# Altium PCB 2019-07-31_20-05-55.PcbDoc
Units mil, origin at the board's own origin, x right, y up, seen from the top; angles counter-clockwise.
Board outline 3200 x 1600 mil, 4 copper layers (Top Layer, MidLayer1, MidLayer2, Bottom Layer); 20 components, 11 nets, 51 pads, 32 vias.
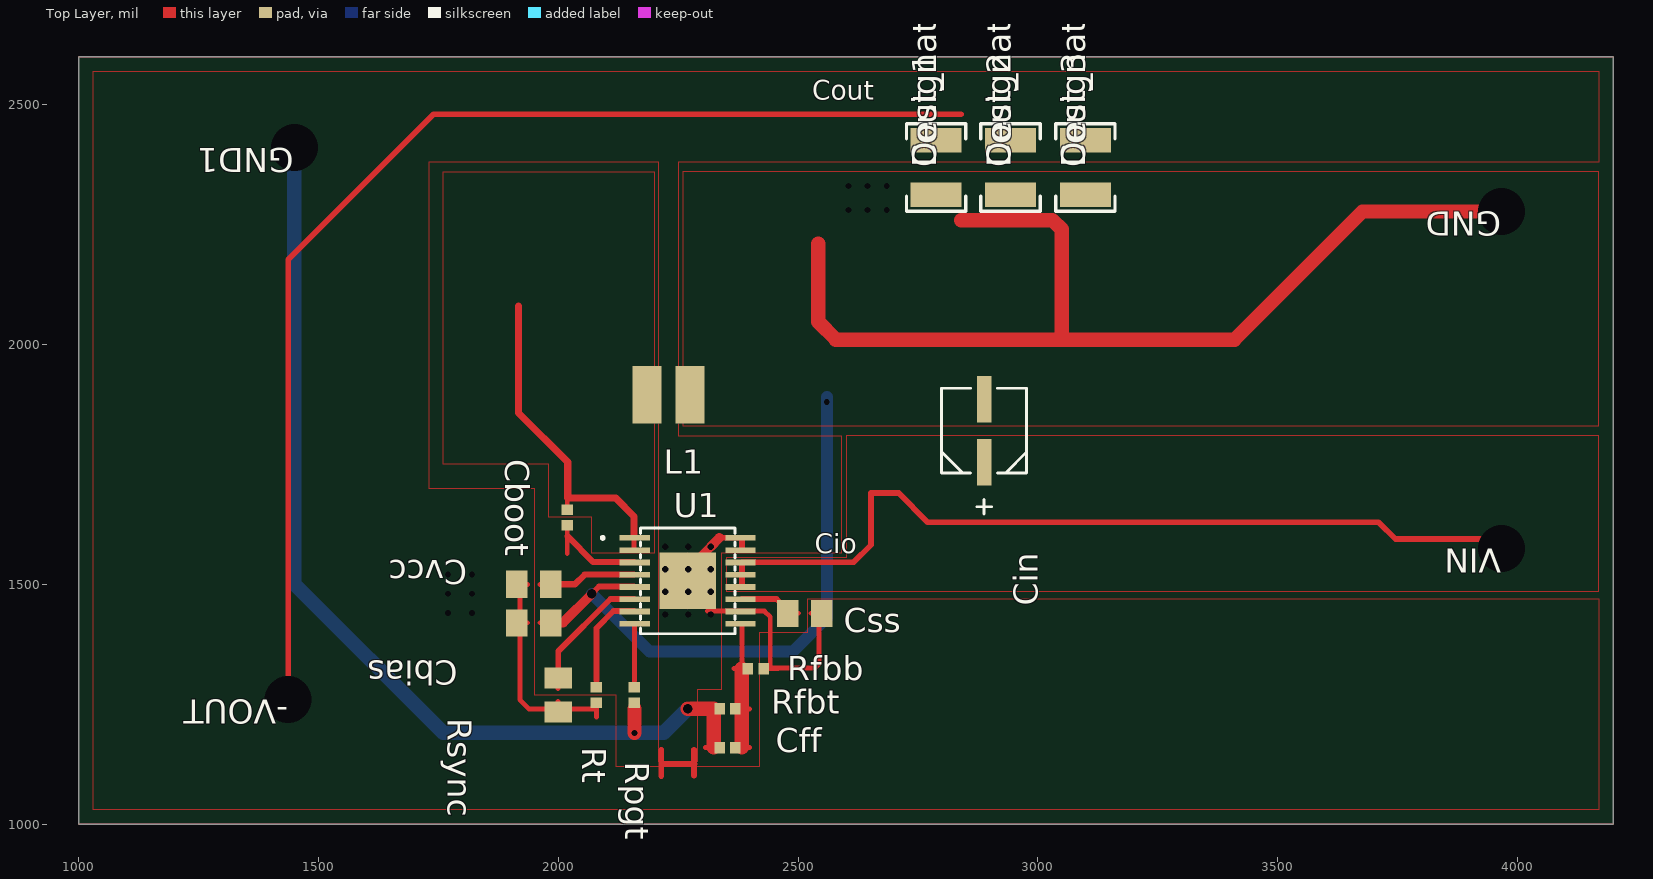
[diagram p0: Top Layer view]
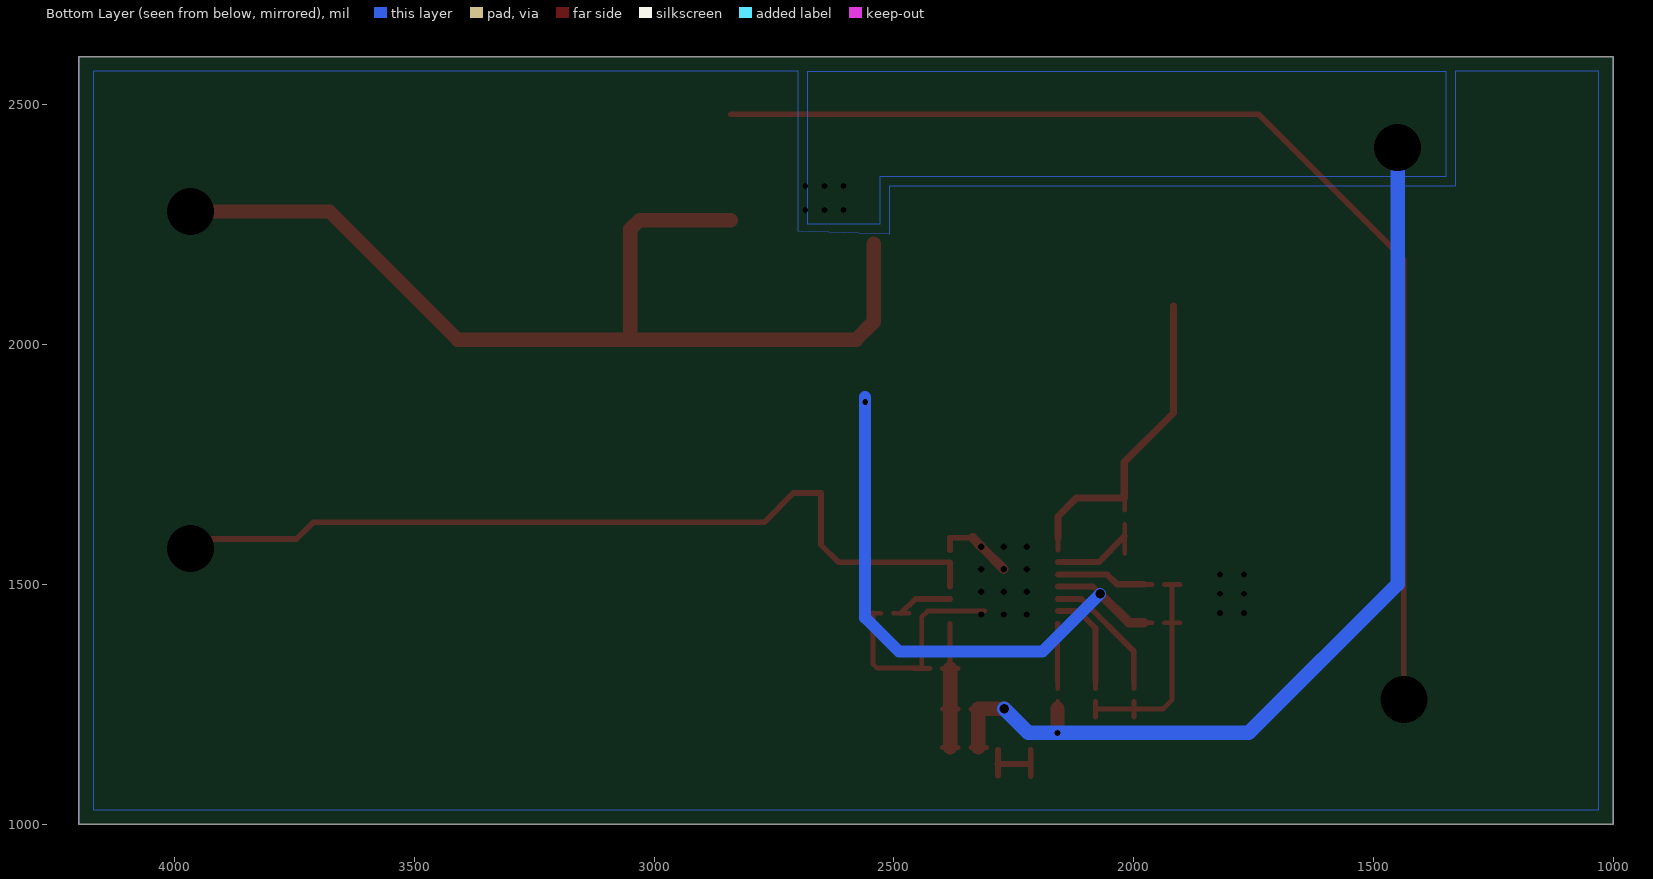
[diagram p1: Bottom Layer view, seen from below]

## Layer stack, top to bottom
Top Layer: signal copper 1.4
Dielectric: core 12.6, FR-4, Dk 4.8
MidLayer1: signal copper 1.4
Dielectric: prepreg 12.6, FR-4, Dk 4.8
MidLayer2: signal copper 1.4
Dielectric: core 12.6, FR-4, Dk 4.8
Bottom Layer: signal copper 1.4

## Board outline
1000,1000 4200,1000 4200,2600 1000,2600

## Design rules (kind name [scope] priority, off if disabled: settings)
PlaneConnect [All] p0: scope1count=1 scope1_0_kind=Board scope1_0_value=Board scope2count=1 scope2_0_kind=Board scope2_0_value=Board commentlength=0 planeconnectstyle=Direct reliefexpansion=20 reliefentries=4 reliefconductorwidth=10 reliefairgap=10
PlaneConnect [All] p1: planeconnectstyle=Direct reliefexpansion=20 reliefentries=4 reliefconductorwidth=10 reliefairgap=10
PolygonConnect [All] p0: scope1count=1 scope1_0_kind=Board scope1_0_value=Board scope2count=1 scope2_0_kind=Board scope2_0_value=Board commentlength=0 connectstyle=Direct reliefconductorwidth=10 reliefentries=4 polygonreliefangle="90 Angle"
PolygonConnect [All] p1: connectstyle=Direct reliefconductorwidth=10 reliefentries=4 polygonreliefangle="90 Angle"

## Components (designator, comment, footprint, x,y, rotation, side; value= is the part's Value field where it differs from the comment)
-VOUT "" TP-1502 1437,1259 r180 top
Cbias "" 0805 1949,1419 r180 top
Cboot "" 0402 2019,1639 r270 top
Cff "" 0402 2353,1159 r0 top
Cin "" SM_RADIAL_B 2888,1820 r90 top
Cout_1 "" 1210_270 2788,2369 r90 top
Cout_2 "" 1210_270 2943,2369 r90 top
Cout_3 "" 1210_270 3099,2369 r90 top
Css "" 0805 2514,1439 r0 top
Cvcc "" 0805 1949,1500 r180 top
GND "" TP-1502 3966,2277 r180 top
GND1 "" TP-1502 1449,2409 r180 top
L1 "" ME3220 2230,1895 r0 top
Rfbb "" 0402 2412,1324 r0 top
Rfbt "" 0402 2353,1240 r0 top
Rpgt "" 0402 2159,1269 r270 top
Rsync "" 0805 2000,1269 r270 top
Rt "" 0402 2079,1269 r270 top
U1 "" PWP0016F 2270,1507 r0 top
VIN "" TP-1502 3966,1574 r180 top

## Footprints (in the part's own frame and the unit in brackets; to place one, negate y for a bottom-side part, rotate by r counter-clockwise, add the part's x,y. Pads: shape width x height; smd on the part's side, far side on the other; paste and mask are expansions set on the pad)
0402 [mil]
  rect 22x24 smd: 1(-16.5,0) 2(16.5,0)
0805 [mil]
  rect 44x57 smd: 1(-35.5,0) 2(35.5,0)
1210_270 [mm]
  rect 1.3x2.7 smd: 1(-1.45,0) 2(1.45,0)
  silkscreen extent -2.32,-1.57 2.32,1.57
ME3220 [mil]
  rect 60x120 smd: 1(-45,0) 2(45,0)
PWP0016F [mm]
  rect 1.6x0.3 smd: 1(-2.8,2.275) 2(-2.8,1.625) 3(-2.8,0.975) 4(-2.8,0.325) 5(-2.8,-0.325) 6(-2.8,-0.975) 7(-2.8,-1.625) 8(-2.8,-2.275) 9(2.8,-2.275) 10(2.8,-1.625) 11(2.8,-0.975) 12(2.8,-0.325) 13(2.8,0.325) 14(2.8,0.975) 15(2.8,1.625) 16(2.8,2.275)
  rect 3x3 smd: 17(0,0)
  silkscreen extent -4.58,-2.8 2.5,2.8
SM_RADIAL_B [mil]
  rect 97x30 smd: 1(-66,0) 2(66,0)
  silkscreen extent -174,-88 88,88
TP-1502 [mil]
  round 65 / inner round 0 / far side round 65 hole 32: 1(0,0)

## Via types
v1: diameter 0, hole 12, Top Layer to Bottom Layer, 14 vias
v2: diameter 0, hole 13, Top Layer to Bottom Layer, 12 vias
v3: diameter 0, hole 98, Top Layer to Bottom Layer, 4 vias
v4: diameter 0, hole 20, Top Layer to Bottom Layer, 2 vias

## Nets (pads, with @x,y where several pads share a name; then routed paths per layer and width w, separated by ;. In a path a pad name is that pad's centre, name@x,y a point inside that pad or via, vN(x,y) a via of type N, cw(c..) or ccw(c..) an arc to the next point about the centre after c; other vN are vias at no path point)
0: -VOUT.1 Cbias.2 Cout_1.2 Cout_2.2 Cout_3.2 Css.2 Cvcc.2 Rfbb.2 Rsync.2 Rt.2 U1.10 U1.15 U1.16 U1.17 | length 3851.7
  Top Layer w10: Cbias.2@1903,1419.5 1936,1419.5 ; Cvcc.2@1903,1499.5 1936,1499.5 ; Cvcc.2@1920,1500 1920,1420 1920,1259 1939,1240 2000,1240 2080,1240 ; Rsync.2@1999.5,1223 1999.5,1256 ; 2079.5,1223 Rt.2@2079.5,1256 ; 2311,1444 2383,1444 2430,1444 2442,1432 2442,1325 2535,1325 2544,1334 Css.2@2544,1440 ; Rfbb.2@2425,1324.5 2458,1324.5 ; 2527,1439.5 Css.2@2560,1439.5
  Top Layer w12: v3(1437,1260) 1437,2177 1740,2480 2840,2480 ; 2215,1100 2215,1125 ; 2215,1155 2215,1125 ; 2283,1101 2283,1125 ; 2283,1155 2283,1125 ; 2336,1597 2383,1597 U1.15@2383,1571 ; 2215,1125 2283,1125 ; 2283,1125 2284,1125 2283,1125
  Top Layer w20: v2(2271,1531) v2(2318,1578) 2336,1597
  other v1: 1770,1440 1820,1440 1770,1480 1820,1480 1770,1520 1820,1520
  other v2: 2223,1437 2271,1437 2318,1437 2223,1484 2271,1484 2318,1484 2223,1531 2318,1531 2223,1578 2271,1578
2: Cin.1 U1.12 U1.13 U1.14 VIN.1 | length 1797.7
  Top Layer w12: U1.12@2383,1495 2383,1520 2383,1546 2616,1546 2652,1582 2652,1690 2710,1690 2770,1629 3010,1629 3710,1629 3746,1594 VIN.1@3967,1594
  other v3: 3967,1574
6: Cff.2 Rfbb.1 Rfbt.2 U1.9 | length 356
  Top Layer w10: Cff.2@2366,1159.5 2399,1159.5 ; Rfbt.2@2366,1239.5 2399,1239.5 ; 2366,1324.5 Rfbb.1@2399,1324.5 ; 2383,1325 U1.9@2383,1418
  Top Layer w30: 2383,1160 2383,1240 2383,1324
8: Cbias.1 Cff.1 Cin.2 Cout_1.1 Cout_2.1 Cout_3.1 GND1.1 GND.1 L1.2 Rfbt.1 Rpgt.2 U1.5 | length 5595.4
  Top Layer w10: 1962,1419.5 Cbias.1@1995,1419.5 ; 2158.5,1223 Rpgt.2@2158.5,1256 ; 2307,1159.5 Cff.1@2340,1159.5 ; 2307,1239.5 Rfbt.1@2340,1239.5
  Top Layer w12: v4(2070,1480) 2085,1495 U1.5@2158,1495
  Top Layer w20: Cbias.1@1979,1420 2010,1420 v4(2070,1480)
  Top Layer w30: v1(2159,1190) 2159,1240 ; v4(2270,1240) 2324,1240 2324,1160 ; 2542,2210 2542,2047 2579,2010 3050,2010 ; 2840,2259 3030,2259 3050,2240 3050,2010 ; v3(3967,2277) 3677,2277 3410,2010 3050,2010
  Bottom Layer w25: v4(2070,1480) 2190,1360 2490,1360 2560,1430 2560,1890
  Bottom Layer w30: v3(1450,2410) 1450,1500 1760,1190 v1(2159,1190) 2220,1190 v4(2270,1240)
  other v1: 2560,1880 2605,2280 2645,2280 2685,2280 2605,2330 2645,2330 2685,2330
9: Cboot.1 L1.1 U1.1 U1.2 | length 728.4
  Top Layer w10: Cboot.1@2019,1654 2019,1715 ; U1.2@2158,1571 U1.1@2158,1597
  Top Layer w15: 1917,2080 1917,1857 2020,1755 2020,1680 2120,1680 2158,1641 U1.1@2158,1597
10: Rsync.1 U1.6 | length 297.1
  Top Layer w10: 1999.5,1282 Rsync.1@1999.5,1315
  Top Layer w12: Rsync.1@2000,1299 2000,1360 2109,1469 U1.6@2158,1469
11: Rt.1 U1.7 | length 235.2
  Top Layer w10: Rt.1@2079.5,1282 2079.5,1315
  Top Layer w12: 2080,1299 2080,1408 2115,1444 U1.7@2158,1444
13: Cvcc.1 U1.4 | length 220.3
  Top Layer w10: 1962,1499.5 Cvcc.1@1995,1499.5
  Top Layer w13: Cvcc.1@1979,1500 2035,1500 2055,1520 U1.4@2158,1520
15: Css.1 U1.11 | length 146.7
  Top Layer w10: Css.1@2468,1439.5 2501,1439.5
  Top Layer w12: U1.11@2383,1469 2455,1469 Css.1@2485,1440
17: Cboot.2 U1.3 | length 221.7
  Top Layer w10: 2019,1564 Cboot.2@2019,1625
  Top Layer w13: 2020,1600 2073,1546 U1.3@2158,1546
20: Rpgt.1 U1.8 | length 153
  Top Layer w10: U1.8@2158,1418 2159,1418 2159,1299 ; Rpgt.1@2158.5,1282 2158.5,1315

## Polygon pours and split planes (outlines as drawn)
9 on Top Layer " " (solid, pour order 1): 2200,2360 2200,1565 2070,1565 2070,1640 1980,1640 1980,1750 1760,1750 1760,2360
2 on Top Layer " " (solid, pour order 2): 4170,1485 4170,1810 2600,1810 2600,1555 2350,1555 2350,1485
8 on Top Layer " " (solid, pour order 3): 2260,2360 2260,1830 4170,1830 4170,2360
0 on Top Layer " " (solid, pour order 7): 1030,2570 4170,2570 4170,2380 2250,2380 2250,1810 2590,1810 2590,1565 2340,1565 2340,1280 2290,1280 2290,1130 2210,1130 2210,2380 1730,2380 1730,1700 1950,1700 1950,1270 2120,1270 2120,1120 2420,1120 2420,1400 2520,1400 2520,1470 4170,1470 4170,1030 1030,1030
8 on Bottom Layer " " (solid, pour order 0): 2530,2250 2680,2250 2680,2570 1350,2570 1350,2350 2530,2350
0 on Bottom Layer " " (solid, pour order 6): 1030,2570 1330,2570 1330,2330 2510,2330 2510,2230 2700,2236 2700,2570 4170,2570 4170,1030 1030,1030
0 on MidLayer2 " " (solid, pour order 4): 1030,2570 1030,1030 4170,1030 4170,2570
0 on MidLayer1 " " (solid, pour order 5): 1030,2570 4170,2570 4170,1030 1030,1030
no net on Top Paste "Top Layer-No Net" (solid, remove dead copper): 2129.25,1422.36 2129.25,1412.51 2190.28,1412.51 2190.28,1422.36
no net on Top Paste "Top Layer-No Net" (solid, remove dead copper): 2349.72,1422.36 2349.72,1412.51 2410.75,1412.51 2410.75,1422.36
no net on Top Paste "Top Layer-No Net" (solid, remove dead copper): 2349.72,1447.95 2349.72,1438.1 2410.75,1438.1 2410.75,1447.95
no net on Top Paste "Top Layer-No Net" (solid, remove dead copper): 2349.72,1473.54 2349.72,1463.69 2410.75,1463.69 2410.75,1473.54
no net on Top Paste "Top Layer-No Net" (solid, remove dead copper): 2349.72,1499.13 2349.72,1489.28 2410.75,1489.28 2410.75,1499.13
no net on Top Paste "Top Layer-No Net" (solid, remove dead copper): 2349.72,1524.72 2349.72,1514.87 2410.75,1514.87 2410.75,1524.72
no net on Top Paste "Top Layer-No Net" (solid, remove dead copper): 2349.72,1550.31 2349.72,1540.46 2410.75,1540.46 2410.75,1550.31
no net on Top Paste "Top Layer-No Net" (solid, remove dead copper): 2349.72,1575.9 2349.72,1566.05 2410.75,1566.05 2410.75,1575.9
no net on Top Paste "Top Layer-No Net" (solid, remove dead copper): 2349.72,1601.49 2349.72,1591.64 2410.75,1591.64 2410.75,1601.49
no net on Top Solder "Top Layer-No Net" (solid, remove dead copper): 2128.27,1602.47 2128.27,1590.66 2191.26,1590.66 2191.26,1602.47
no net on Top Solder "Top Layer-No Net" (solid, remove dead copper): 2128.27,1576.88 2128.27,1565.07 2191.26,1565.07 2191.26,1576.88
no net on Top Solder "Top Layer-No Net" (solid, remove dead copper): 2128.27,1551.29 2128.27,1539.48 2191.26,1539.48 2191.26,1551.29
no net on Top Solder "Top Layer-No Net" (solid, remove dead copper): 2128.27,1525.7 2128.27,1513.89 2191.26,1513.89 2191.26,1525.7
no net on Top Solder "Top Layer-No Net" (solid, remove dead copper): 2128.27,1500.11 2128.27,1488.3 2191.26,1488.3 2191.26,1500.11
no net on Top Solder "Top Layer-No Net" (solid, remove dead copper): 2128.27,1474.52 2128.27,1462.71 2191.26,1462.71 2191.26,1474.52
no net on Top Solder "Top Layer-No Net" (solid, remove dead copper): 2128.27,1448.93 2128.27,1437.12 2191.26,1437.12 2191.26,1448.93
no net on Top Solder "Top Layer-No Net" (solid, remove dead copper): 2128.27,1423.34 2128.27,1411.53 2191.26,1411.53 2191.26,1423.34
no net on Top Solder "Top Layer-No Net" (solid, remove dead copper): 2348.74,1423.34 2348.74,1411.53 2411.73,1411.53 2411.73,1423.34
no net on Top Solder "Top Layer-No Net" (solid, remove dead copper): 2348.74,1448.93 2348.74,1437.12 2411.73,1437.12 2411.73,1448.93
no net on Top Solder "Top Layer-No Net" (solid, remove dead copper): 2348.74,1474.52 2348.74,1462.71 2411.73,1462.71 2411.73,1474.52
no net on Top Solder "Top Layer-No Net" (solid, remove dead copper): 2348.74,1500.11 2348.74,1488.3 2411.73,1488.3 2411.73,1500.11
no net on Top Solder "Top Layer-No Net" (solid, remove dead copper): 2348.74,1525.7 2348.74,1513.89 2411.73,1513.89 2411.73,1525.7
no net on Top Solder "Top Layer-No Net" (solid, remove dead copper): 2348.74,1551.29 2348.74,1539.48 2411.73,1539.48 2411.73,1551.29
no net on Top Solder "Top Layer-No Net" (solid, remove dead copper): 2348.74,1576.88 2348.74,1565.07 2411.73,1565.07 2411.73,1576.88
no net on Top Solder "Top Layer-No Net" (solid, remove dead copper): 2348.74,1602.47 2348.74,1590.66 2411.73,1590.66 2411.73,1602.47
no net on Top Paste "Top Layer-No Net" (solid, remove dead copper): 2214.88,1562.12 2214.88,1510.94 2266.06,1510.94 2266.06,1562.12
no net on Top Paste "Top Layer-No Net" (solid, remove dead copper): 2214.88,1503.06 2214.88,1451.88 2266.06,1451.88 2266.06,1503.06
no net on Top Paste "Top Layer-No Net" (solid, remove dead copper): 2273.94,1562.12 2273.94,1510.94 2325.12,1510.94 2325.12,1562.12
no net on Top Paste "Top Layer-No Net" (solid, remove dead copper): 2273.94,1503.06 2273.94,1451.88 2325.12,1451.88 2325.12,1503.06
no net on Top Layer "Top Layer-No Net" (solid, remove dead copper): 2270,1566.06
no net on Top Layer "Top Layer-No Net" (solid, remove dead copper): 2270,1447.94
no net on Top Solder "Top Layer-No Net" (solid, remove dead copper): 2270,1566.06
no net on Top Solder "Top Layer-No Net" (solid, remove dead copper): 2270,1447.94

## Other copper
Multi-Layer:
  the board outline again, w1

## Silkscreen, mask and mechanical layers (free items; w line width, h text height)
Top Overlay:
  text "Cout" at 2530,2510 h40
  text "Cio" at 2535,1565 h40

## Text inside footprints (layer, text, board x,y; h text height)
Cout_1: Top Overlay "Designator53" at 2788,2369 h50 r90
Cout_2: Top Overlay "Designator53" at 2943,2369 h50 r90
Cout_3: Top Overlay "Designator53" at 3099,2369 h50 r90